# Altium PCB PCB.PcbDoc
Units mil, origin at the board's own origin, x right, y up, seen from the top; angles counter-clockwise.
Board outline 3765 x 2575 mil, 2 copper layers (Component Side, Bottom Layer), stack 12.8 mil thick; 7 components, 26 nets, 51 pads, 0 vias.
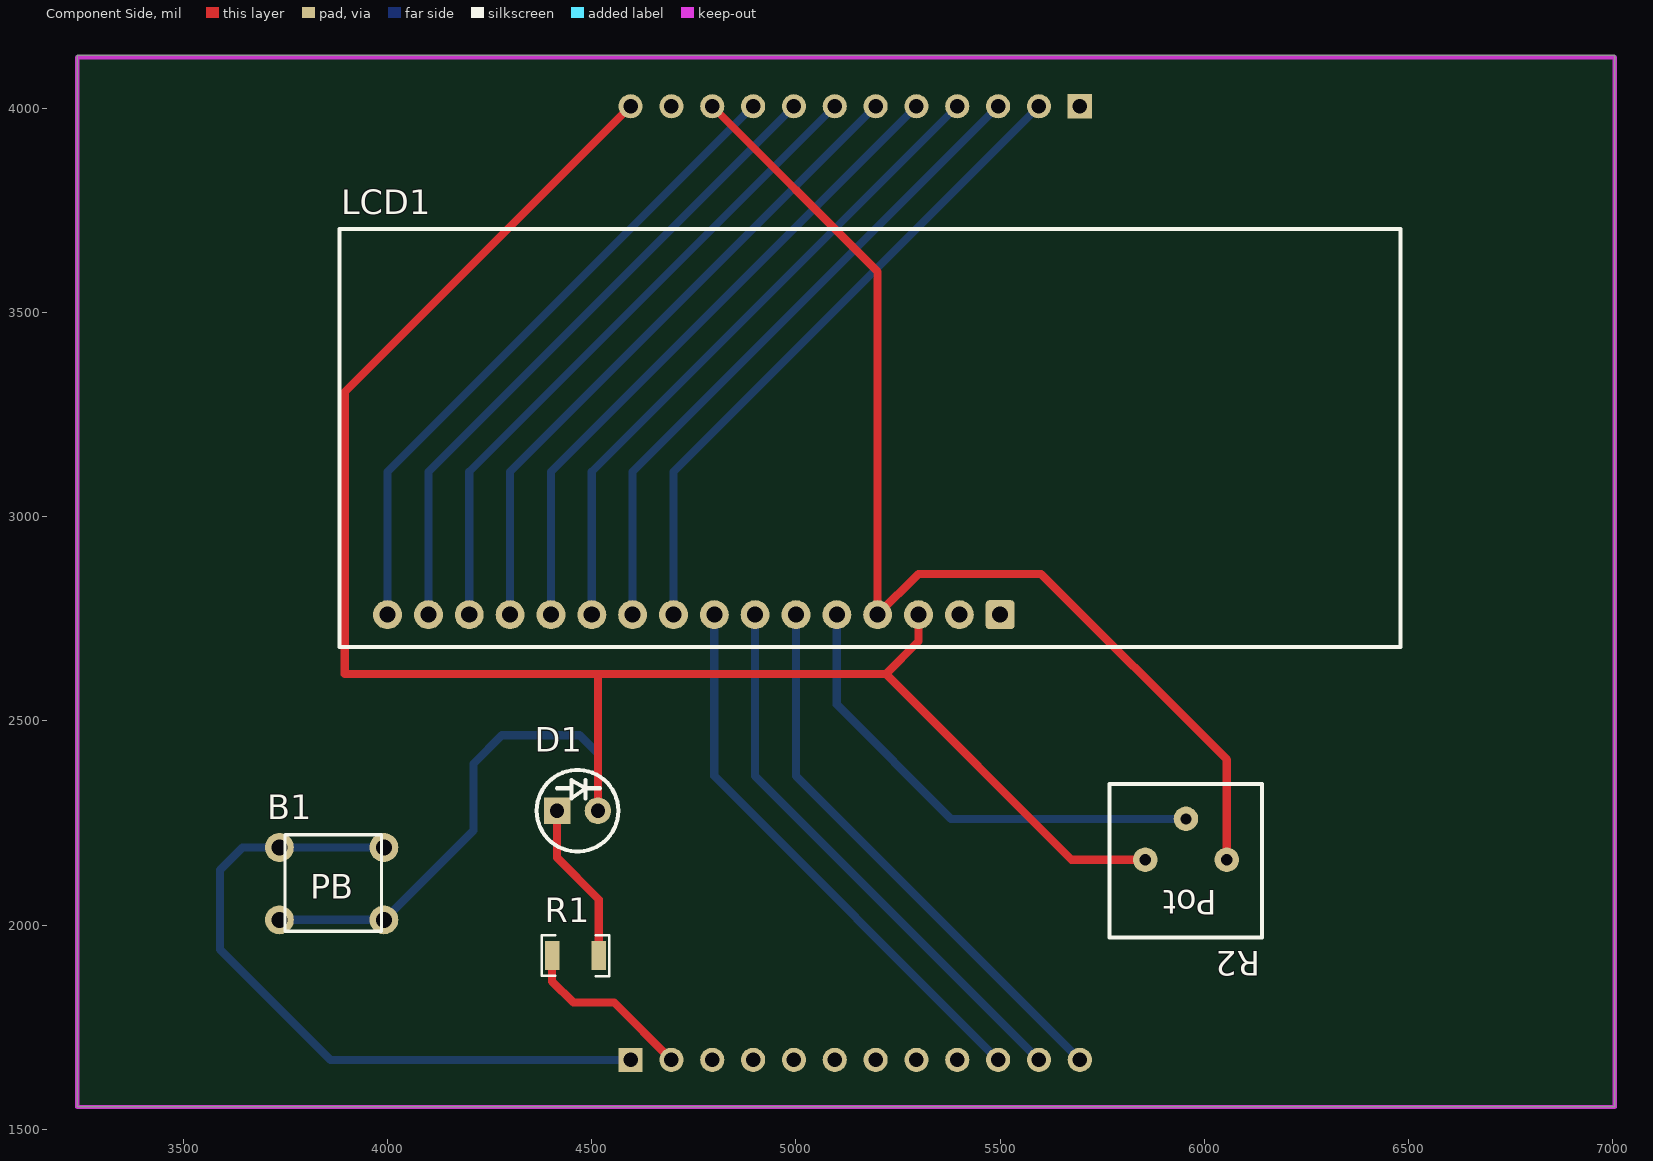
[diagram p0: Component Side view]
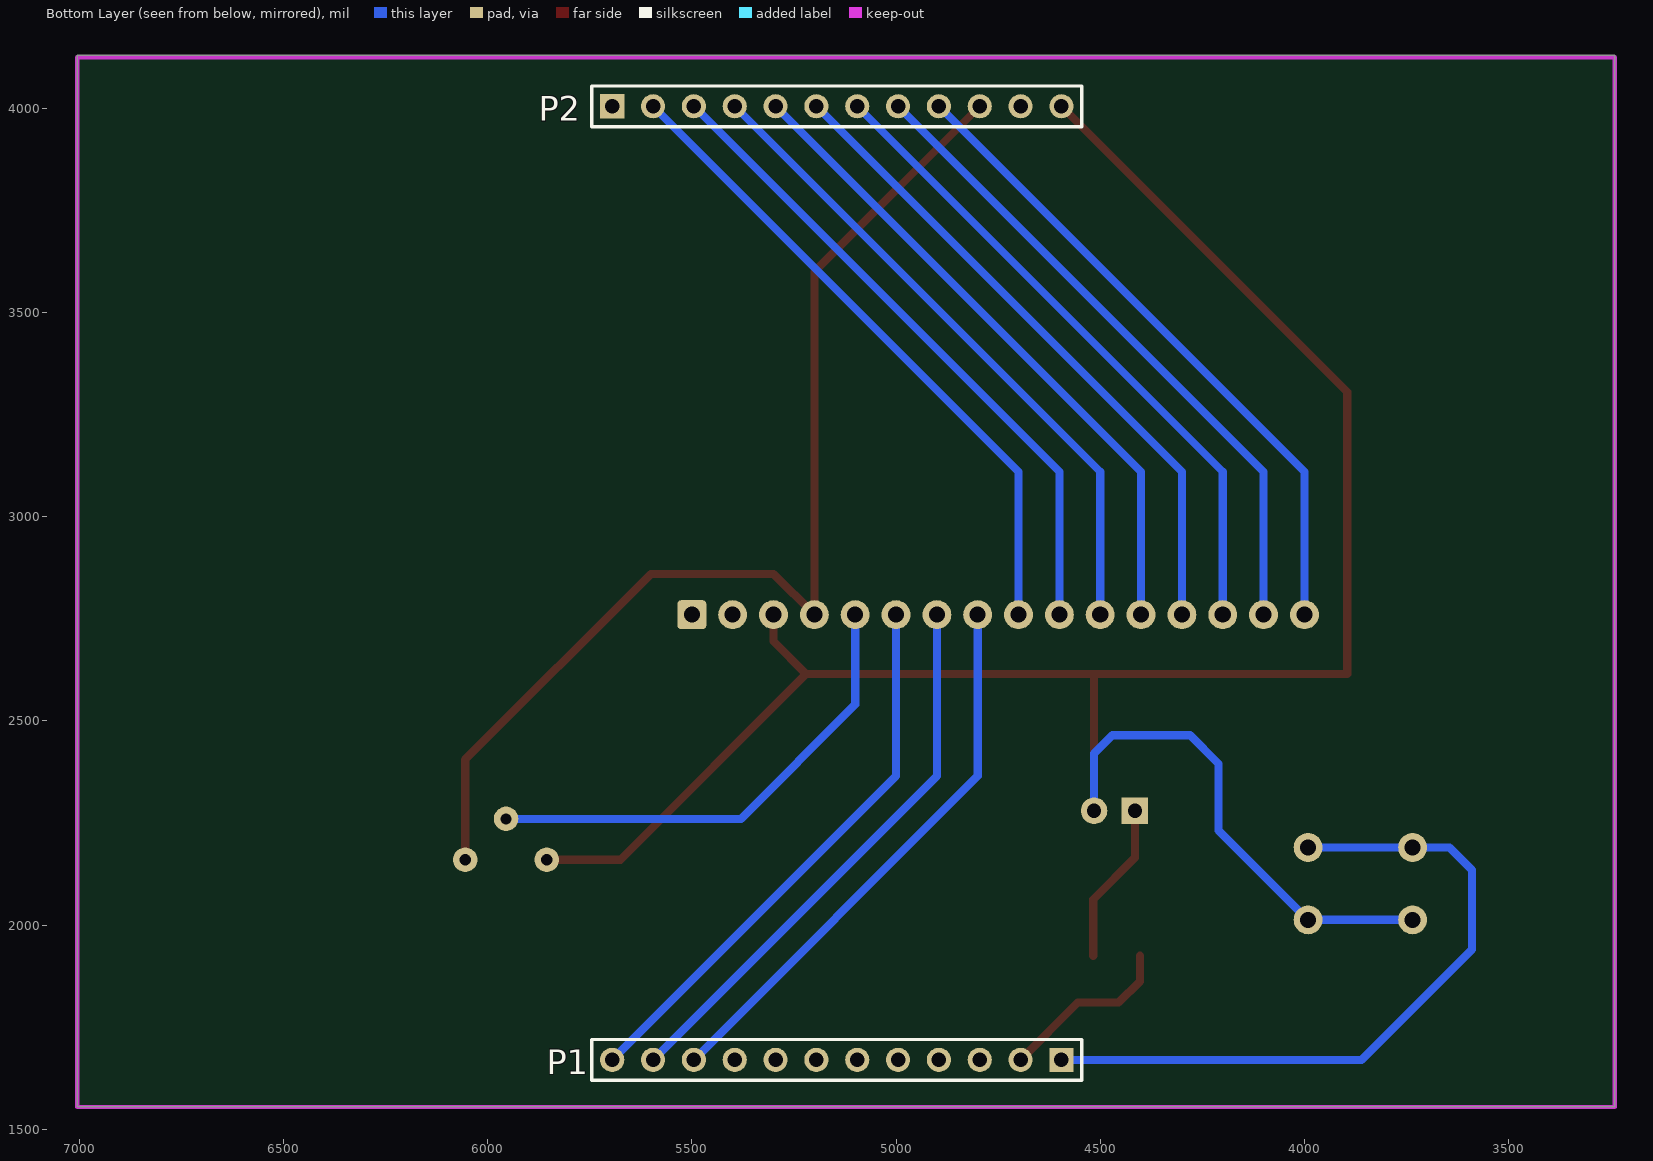
[diagram p1: Bottom Layer view, seen from below]
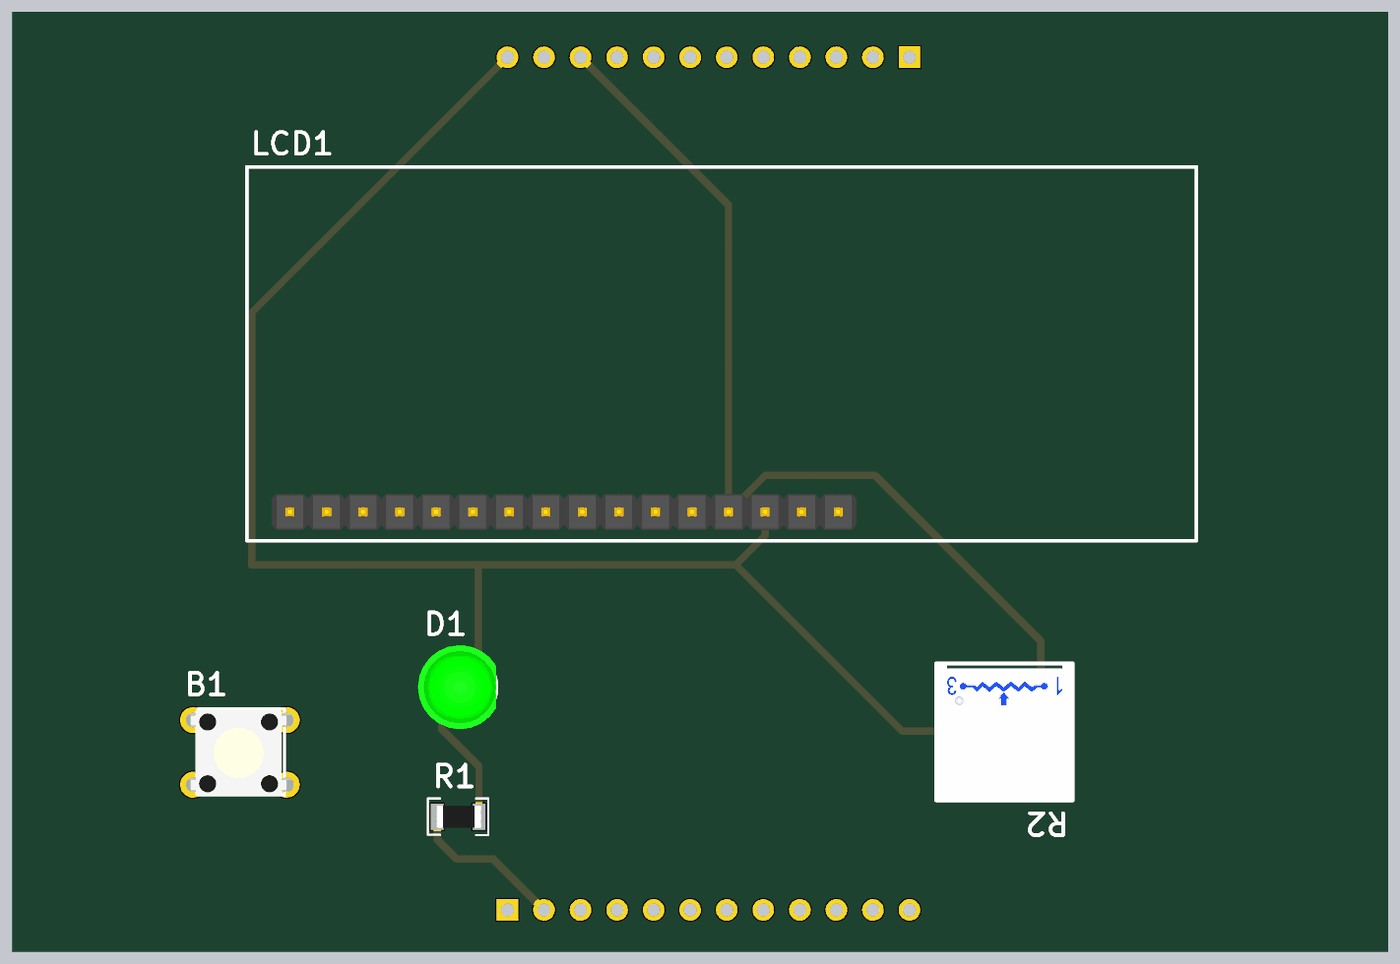
[diagram p2: 3D render of the assembled board from above, using the file's embedded part models]

## Layer stack, top to bottom
Top Solder: solder mask 0.4, Solder Resist, Dk 3.5
Component Side: signal copper 1.4
Dielectric 1: core 10, FR-4, Dk 4.2
Bottom Layer: signal copper 1.4
Solder Side: solder mask 0.4, Solder Resist, Dk 3.5

## Board outline
3240,1555 7005,1555 7005,4130 3240,4130

## Design rules (kind name [scope] priority, off if disabled: settings)
Clearance [All] p1: gap=10
PolygonConnect [All] p1: connectstyle=Relief reliefconductorwidth=10 reliefentries=4 polygonreliefangle="90 Angle" airgapwidth=10
RoutingVias [All] p1: holewidth=28 width=50 viastyle="Through Hole" minholewidth=28 minwidth=50 maxholewidth=28 maxwidth=50
SolderMaskExpansion [All] p1: expansion=4
Width [All] p1: maxlimit=30 minlimit=10 preferedwidth=20
30 further rules are at their usual default settings.

## Components (designator, comment, footprint, x,y, rotation, side; value= is the part's Value field where it differs from the comment)
B1 "BoutonPoussoir" BoutonPoussoirMini 3735,2190 r0 top
D1 "LED_GREEN" LED_GREEN 4415,2280 r0 top
LCD1 "LCM-S01602DTR/M" LCM-S01602DTR/M 4000,2760 r0 top
P1 "Header 12" HDR1X12 4595,1670 r0 bottom (schematic designator P4)
P2 "Header 12" HDR1X12 5695,4005 r180 bottom (schematic designator P5)
R1 "Res" RES1206R 4460,1925 r0 top
R2 "ResVar" Potentiometer 6055,2160 r180 top

## Footprints (in the part's own frame and the unit in brackets; to place one, negate y for a bottom-side part, rotate by r counter-clockwise, add the part's x,y. Pads: shape width x height; smd on the part's side, far side on the other; paste and mask are expansions set on the pad)
BoutonPoussoirMini [mm] "Bouton Poussoir 6mm x 6mm flat type"
  round 1.8 hole 1: 1(0,0) 2(0,-4.5) 3(6.5,0) 4(6.5,-4.5)
  silkscreen extent 0.35,-5.21 6.35,0.79, body extent -0.69,-5.29 7.01,0.71, height 4.3
HDR1X12 [mm] "Connector; Header; 12 Position"
  rect 1.5x1.5 hole 0.9: 1(0,0)
  round 1.5 hole 0.9: 2(2.54,0) 3(5.08,0) 4(7.62,0) 5(10.16,0) 6(12.7,0) 7(15.24,0) 8(17.78,0) 9(20.32,0) 10(22.86,0) 11(25.4,0) 12(27.94,0)
  silkscreen extent -1.27,-1.27 29.21,1.27
LCM-S01602DTR/M [mm] "LCD MODULE 16X2 CHARACTER"
  round 1.8 hole 1: 1(33.02,0) 2(30.48,0) 3(27.94,0) 4(25.4,0) 5(22.86,0) 6(20.32,0) 7(17.78,0) 8(15.24,0) 9(12.7,0) 10(10.16,0) 11(7.62,0) 12(5.08,0) 13(2.54,0) 14(0,0) 16(35.56,0)
  rrect25% 1.8x1.8 hole 1: 15(38.1,0)
  silkscreen extent -3,-2 63,24, body extent -1.27,-1.27 39.37,1.27, height 9.5
LED_GREEN [mil] "LED 5MM GREEN DIFFUSED"
  rect 65x65 hole 35: 1(0,0)
  round 65 hole 35: 2(100,0)
  silkscreen extent -50,-100 150,100, body extent -65,-115 149,115, height 346
Potentiometer [mil] "TRIMMER 1K OHM 0.5W PC PIN"
  round 60 hole 27.56: 1(0,0) 2(100,-100) 3(200,0)
  silkscreen extent -87,-185 287,190, body extent -87,-187 287,187, height 199
RES1206R [mm] "resistor 1206 reflow soldering"
  rect 0.9x1.8 smd: 1(-1.45,0) 2(1.45,0)
  silkscreen extent -2.1,-1.27 2.1,1.27, body extent -1.5,-0.77 1.6,0.78, height 0.55

## Part data
B1: "Switch Tactile SPST-NO"
D1: "Typical Green LED"
LCD1: "LCD MODULE 16X2 CHARACTER"
P1 P2: "Header, 12-Pin"
R1: "Resistor"
R2: "Potentiometer"

## Nets (pads, with @x,y where several pads share a name; then routed paths per layer and width w, separated by ;. In a path a pad name is that pad's centre, name@x,y a point inside that pad or via, vN(x,y) a via of type N, cw(c..) or ccw(c..) an arc to the next point about the centre after c; other vN are vias at no path point)
3.3V: P2.11
5V: LCD1.2 P2.10 R2.1 | length 2742.6
  Component Side w20: P2.10 5200,3600 LCD1.2 5300,2860 5600,2860 6055,2405 R2.1
GND: B1.2 B1.4 D1.2 LCD1.1 P2.12 R2.3 | length 5565.1
  Component Side w20: D1.2 4515,2610 4510,2615 ; P2.12 3895,3305 3895,2615 4510,2615 ; LCD1.1 5300,2695 5220,2615 ; R2.3 5675,2160 5220,2615 ; 4510,2615 5220,2615
  Bottom Layer w20: B1.2 B1.4 4210,2231.93 4210,2395 4280,2465 4470,2465 4515,2420 D1.2
NetD1_1: D1.1 R1.2 | length 397.3
  Component Side w20: D1.1 4415,2165 4517.09,2062.91 R1.2
POT: LCD1.3 R2.2 | length 1191
  Bottom Layer w20: LCD1.3 5100,2540 5380,2260 R2.2
RA0: B1.1 B1.3 P1.1 | length 1735.5
  Bottom Layer w20: B1.3 B1.1 3645,2190 3590,2135 3590,1940 3860,1670 P1.1
RA1: P1.2 R1.1 | length 434.6
  Component Side w20: R1.1 4402.91,1862.09 4455,1810 4555,1810 P1.2
RA2: P1.3
RA3: P1.4
RA4: P1.5
RB0: P1.6
RB1: P1.7
RB2: P1.8
RB3: P1.9
RB4: LCD1.6 P1.10 | length 1377.9
  Bottom Layer w20: LCD1.6 4800,2365 P1.10
RB5: LCD1.5 P1.11 | length 1377.9
  Bottom Layer w20: LCD1.5 4900,2365 P1.11
RB6: LCD1.4 P1.12 | length 1377.9
  Bottom Layer w20: LCD1.4 5000,2365 P1.12
RB7: P2.1
RB8: LCD1.7 P2.2 | length 1615.7
  Bottom Layer w20: LCD1.7 4700,3110 P2.2
RB9: LCD1.8 P2.3 | length 1615.7
  Bottom Layer w20: LCD1.8 4600,3110 P2.3
RB10: LCD1.9 P2.4 | length 1615.7
  Bottom Layer w20: LCD1.9 4500,3110 P2.4
RB11: LCD1.10 P2.5 | length 1615.7
  Bottom Layer w20: LCD1.10 4400,3110 P2.5
RB12: LCD1.11 P2.6 | length 1615.7
  Bottom Layer w20: LCD1.11 4300,3110 P2.6
RB13: LCD1.12 P2.7 | length 1615.7
  Bottom Layer w20: LCD1.12 4200,3110 P2.7
RB14: LCD1.13 P2.8 | length 1615.7
  Bottom Layer w20: LCD1.13 4100,3110 P2.8
RB15: LCD1.14 P2.9 | length 1615.7
  Bottom Layer w20: LCD1.14 4000,3110 P2.9
pads on no net: LCD1.15 LCD1.16

## Keep-outs
Keep-Out Layer:
  lines w10: 3240,1555 3240,4125 7005,4125 7005,1555 3240,1555

## Text inside footprints (layer, text, board x,y; h text height)
B1: Top Overlay "PB" at 3810,2065 h60
R2: Top Overlay "Pot" at 6030,2085 h60 r180